# Altium PCB Copy of Final Flashlight PCB.PcbDoc
Units mil, origin at the board's own origin, x right, y up, seen from the top; angles counter-clockwise.
Board outline 1095 x 1220 mil, 2 copper layers (Top Layer, Bottom Layer); 15 components, 12 nets, 42 pads, 4 vias.
Unrouted connection lines stored in the file: 11.
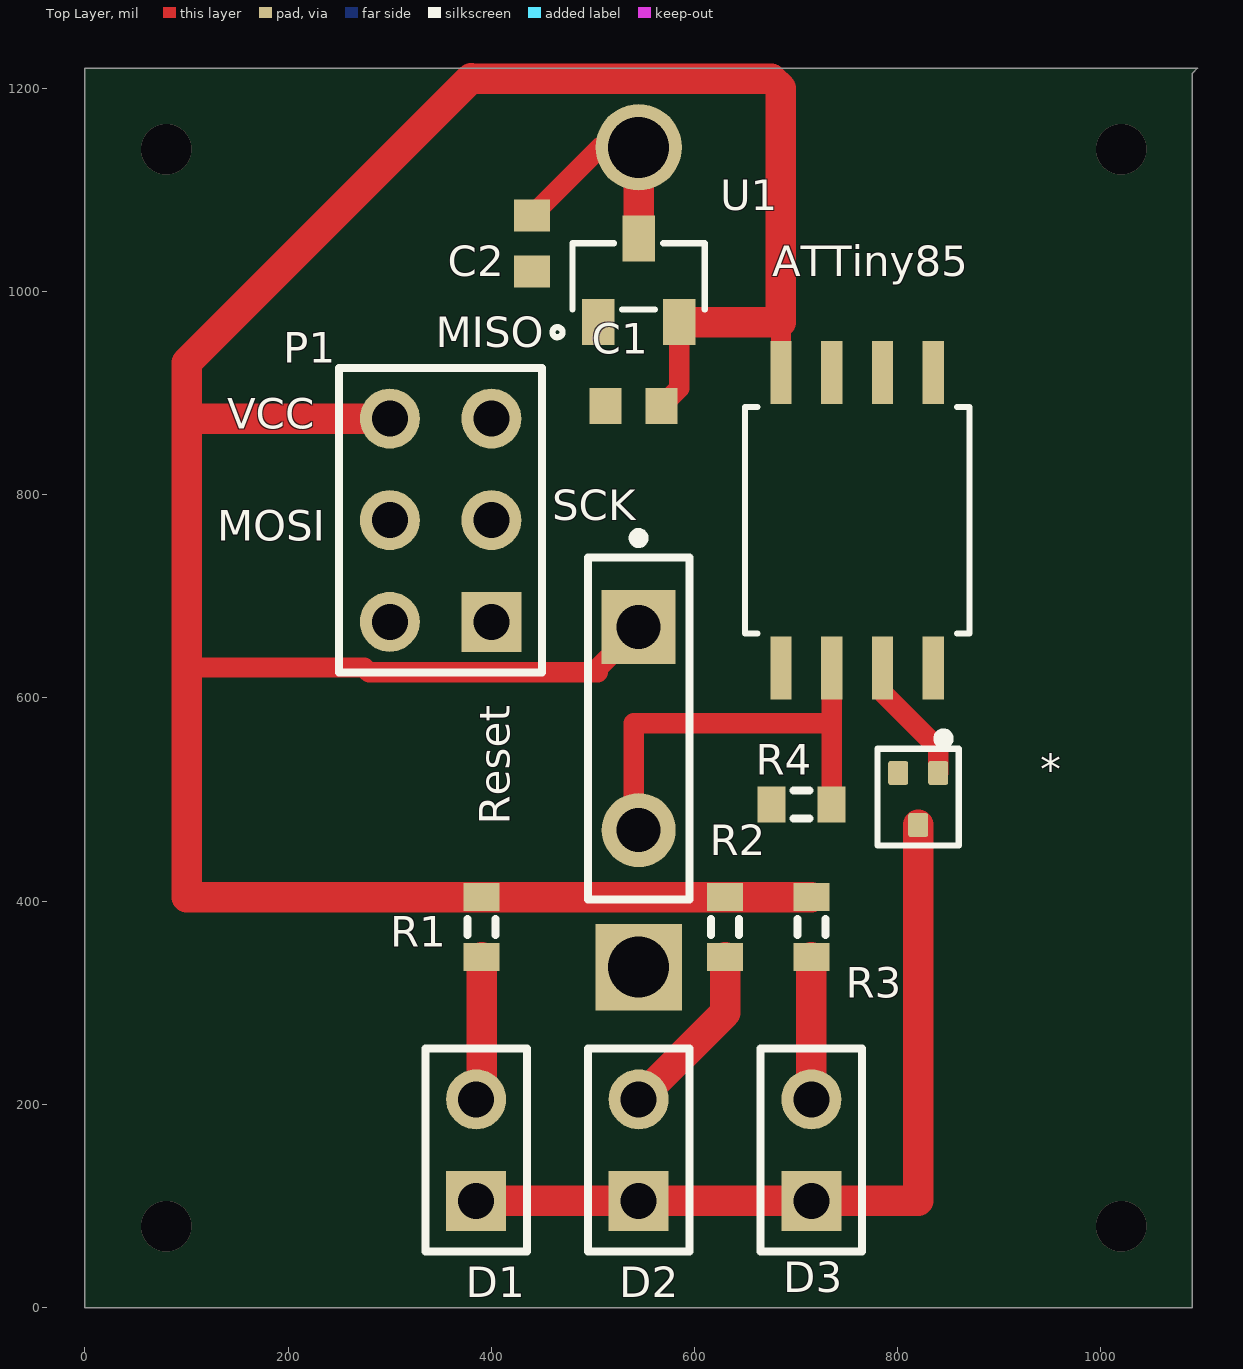
[diagram p0: Top Layer view]
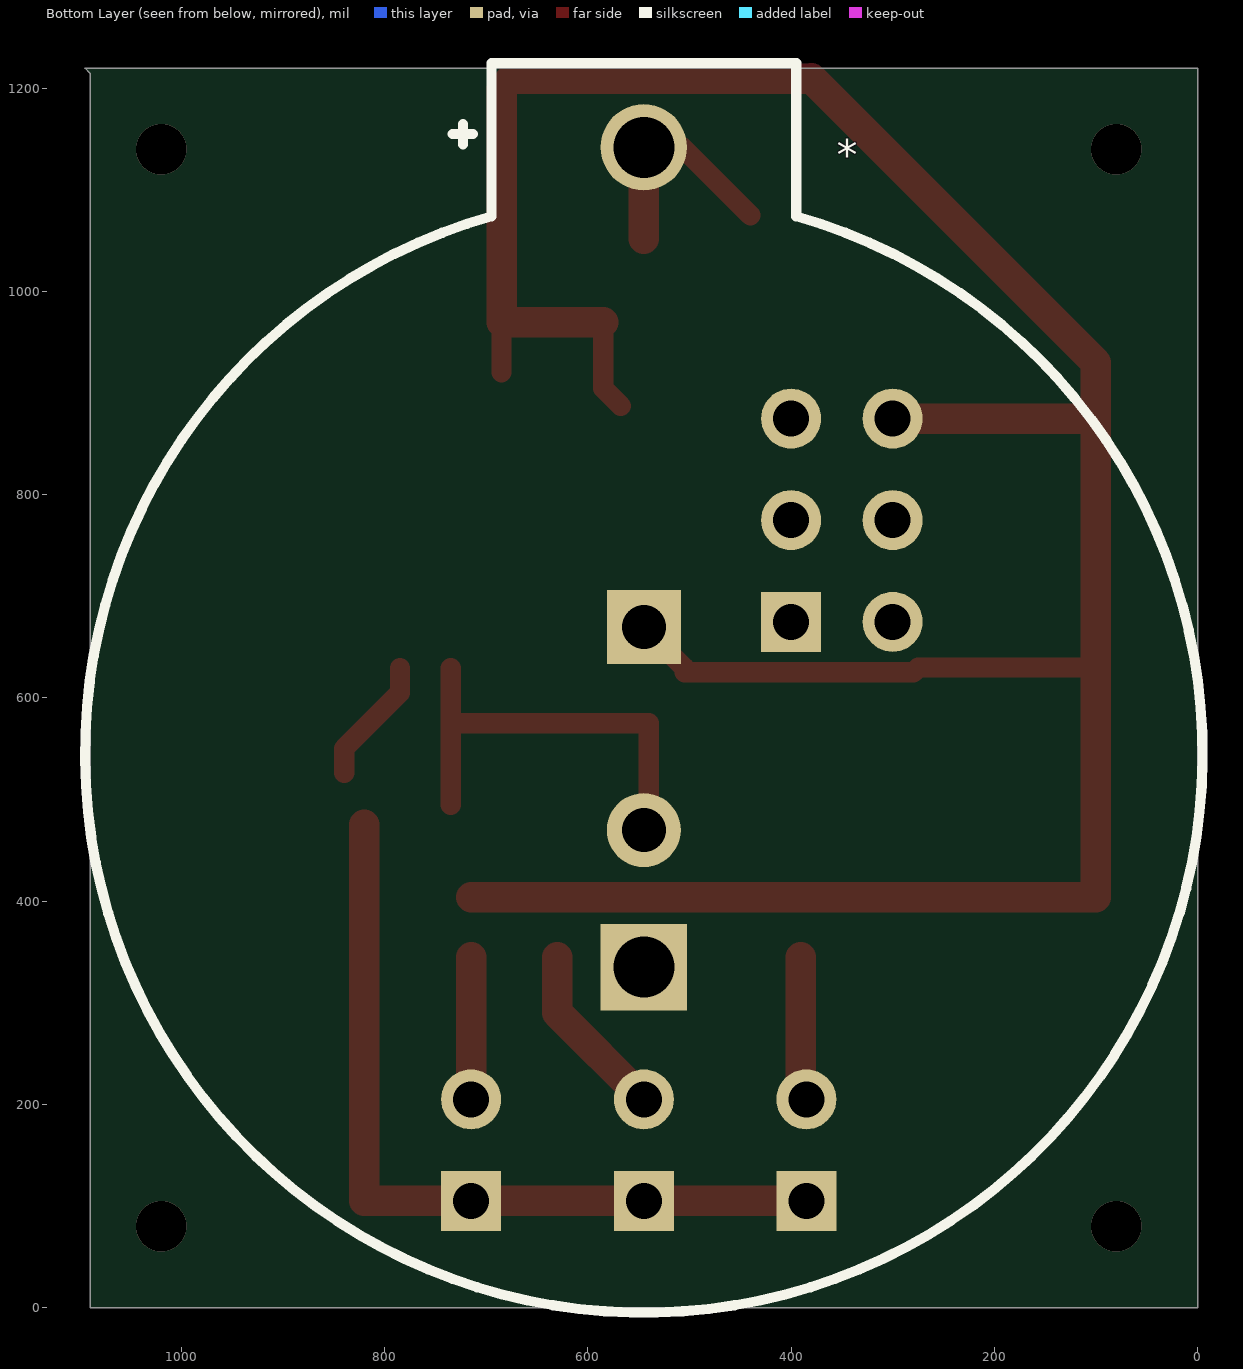
[diagram p1: Bottom Layer view, seen from below]

## Layer stack, top to bottom
Top Solder: solder mask 0.4, Solder Resist, Dk 3.5
Top Layer: signal copper 1.4
Dielectric 1: dielectric 12.6, FR-4, Dk 4.8
Bottom Layer: signal copper 1.4
Bottom Solder: solder mask 0.4, Solder Resist, Dk 3.5

## Board outline
0,0 0,1220 1095,1220 1090,1215 1090,0

## Design rules (kind name [scope] priority, off if disabled: settings)
Clearance [All] p1: gap=10 ignorepadtopadclearanceinfootprint=TRUE except(0: Arc-Hole Track-Hole SMDPad-Hole THPad-Hole Via-Hole Fill-Hole Poly-Hole Region-Hole Text-Hole)
PolygonConnect [All] p1: connectstyle=Direct reliefconductorwidth=10 reliefentries=4 polygonreliefangle="90 Angle" airgapwidth=10
RoutingVias [All] p1: holewidth=28 width=50 viastyle="Through Hole" minholewidth=28 minwidth=50 maxholewidth=28 maxwidth=50
SolderMaskExpansion [All] p1: expansion=4
Width [All] p1: maxlimit=500 minlimit=10 preferedwidth=10 minimp=50.000000 maximp=50.000000 favimp=50.000000
30 further rules are at their usual default settings.

## Classes and differential pairs
component class "181031 Schematic with PCB": * ATTiny85 C1 C2 D1 D2 D3 P1 R1 R2 R3 R4 SCK U1

## Components (designator, comment, footprint, x,y, rotation, side; value= is the part's Value field where it differs from the comment)
* "Keystone 1025" 1025 545,335 r90 bottom
* "N-Channel MOSFET" SOT416 820,475 r90 top
ATTiny85 "ATTiny85" 8S2 760,775 r90 top
C1 "Cap Semi" 1608[0603] 540,887.44 r0 top value=100pF
C2 "Cap Semi" 1608[0603] 440,1047.44 r90 top value=100pF
D1 "LED2" HDR1X2 385,105 r90 top
D2 "LED2" HDR1X2 545,105 r90 top
D3 "LED2" HDR1X2 715,105 r90 top
P1 "Header 3X2A" HDR2X3_CEN 400,675 r90 top
R1 "Res3" J1-0603 390.47,374.53 r90 top value=1K (schematic designator R2)
R2 "Res3" J1-0603 630,374.53 r90 top value=1K (schematic designator R3)
R3 "Res3" J1-0603 715,374.53 r90 top value=1K (schematic designator R4)
R4 "Res3" J1-0603 705.47,495 r0 top value=1K (schematic designator R1)
SCK "SW-PB" SPST-2 545,570 r270 top (schematic designator S1)
U1 "AP2120N-3.3TRG1" SOT-23 545,1015 r0 top value=Value

## Footprints (in the part's own frame and the unit in brackets; to place one, negate y for a bottom-side part, rotate by r counter-clockwise, add the part's x,y. Pads: shape width x height; smd on the part's side, far side on the other; paste and mask are expansions set on the pad)
8S2 [mil]
  rect 62x21 smd paste+0 mask+0: 1(-145.5,75) 2(-145.5,25) 3(-145.5,-25) 4(-145.5,-75) 5(145.5,-75) 6(145.5,-25) 7(145.5,25) 8(145.5,75)
  silkscreen extent -112,-110 112,110, body extent -157,-105 167,106, height 85
1025 [mil] "BATT HOLDER COIN 1/2 CELL PC PIN"
  round 85 hole 60: 1(807,0)
  rect 85x85 hole 60: 2(0,0)
  silkscreen extent -340,-550 890,550, body extent -334,-560 885,547, height 503
1608[0603] [mm] "Chip Capacitor, Body 1.6x0.8mm, IPC High Density"
  rect 0.8x0.9 smd: 1(-0.7,0) 2(0.7,0)
  body extent -0.87,-0.48 0.87,0.48, height 1.3
HDR1X2 [mm] "Connector; Header; 2 Position"
  rect 1.5x1.5 hole 0.9: 1(0,0)
  round 1.5 hole 0.9: 2(2.54,0)
  silkscreen extent -1.27,-1.27 3.81,1.27
HDR2X3_CEN [mm] "Connector; Header; 3x2 Position"
  rect 1.5x1.5 hole 0.9: 1(0,0)
  round 1.5 hole 0.9: 2(2.54,0) 3(5.08,0) 4(0,2.54) 5(2.54,2.54) 6(5.08,2.54)
  silkscreen extent -1.27,-1.27 6.35,3.81
J1-0603 [mm] "Chip Resistor, Body 1.6x0.8mm, IPC High Density"
  rect 0.7x0.9 smd: 1(-0.75,0) 2(0.75,0)
  silkscreen extent -0.2,-0.35 0.2,0.35, body extent -0.85,-0.48 0.85,0.48, height 0.9
SOT416 [mm]
  rrect25% 0.6x0.5 smd: 1(1.3,-0.5) 2(1.3,0.5) 3(0,0)
  silkscreen extent -0.51,-1.02 2.29,1.02
SOT-23 [mil]
  rect 32x45 smd paste+0 mask+0: 1(-40,-45) 2(40,-45) 3(0,37.2)
  silkscreen extent -85,-60 65,33, body extent -58,-62 60,50, height 47
SPST-2 [mm] "Switch; 2 Leads"
  rect 1.85x1.85 hole 1.1: 1(-2.54,0)
  round 1.85 hole 1.1: 2(2.54,0)
  silkscreen extent -4.89,-1.27 4.28,1.27

## Part data
*: "BATT HOLDER COIN 1/2 CELL PC PIN"
ATTiny85: library part ATTiny85_1
C1 C2: "Capacitor (Semiconductor SIM Model)", LatestRevisionDate=29-May-2009, LatestRevisionNote="IPC-7351 Footprint Added.", PackageDescription="Chip Capacitor", PackageReference=C1206, Published=8-Jun-2000, Publisher="Altium Limited"
D1 D2 D3: "Typical RED, GREEN, YELLOW, AMBER GaAs LED", LatestRevisionDate=17-Jul-2002, LatestRevisionNote="Re-released for DXP Platform.", PackageDescription="SM LED; 2 Flat Leads", PackageReference=3.2X1.6X1.1, PackageVersion=Feb-2002, Published=8-Jun-2000, Publisher="Altium Limited"
P1: "Header, 3-Pin, Dual row", LatestRevisionDate=17-Jul-2002, LatestRevisionNote="Re-released for DXP Platform.", Publisher="Altium Limited"
R1 R2 R3 R4: "Resistor", LatestRevisionDate=29-May-2009, LatestRevisionNote="IPC-7351 Footprint Added.", PackageDescription="Chip Resistor", PackageReference=J1-0603, Published=8-Jun-2000, Publisher="Altium Limited"
SCK: "Switch", LatestRevisionDate=17-Jul-2002, LatestRevisionNote="Re-released for DXP Platform.", PackageDescription="Switch; 2 Leads", PackageReference=SPST-2, Published=24-Mar-1999, Publisher="Altium Limited"
U1: "IC REG LINEAR 3.3V 150MA SOT23", Built_By=EMA_UL_Team, Manufacturer_Part_Number=AP2120N-3.3TRG1, RefDes=RefDes, Type=DEV, Vendor="Diodes Inc"

## Via types
v1: diameter 50, hole 50, Top Layer to Bottom Layer, 4 vias

## Nets (pads, with @x,y where several pads share a name; then routed paths per layer and width w, separated by ;. In a path a pad name is that pad's centre, name@x,y a point inside that pad or via, vN(x,y) a via of type N, cw(c..) or ccw(c..) an arc to the next point about the centre after c; other vN are vias at no path point)
GND: *.2 ATTiny85.4 C1.1 C2.1 P1.4 R4.1 U1.1
Net*_1: *.1@839.68,526.18 ATTiny85.3 | length 126
  Top Layer w20: ATTiny85.3 785,605 839.68,550.32 *.1@839.68,526.18
Net*_3: *.3 D1.1 D2.1 D3.1 | length 805
  Top Layer w30: D1.1 D2.1 D3.1 820,105 *.3
NetATTiny85_1: ATTiny85.1 P1.1
NetATTiny85_2: ATTiny85.2 R4.2 SCK.2 | length 411.6
  Top Layer w20: SCK.2@545,495 540,500 540,575 735,575 ; R4.2 735,575 ; ATTiny85.2 735,575
NetATTiny85_5: ATTiny85.5 P1.5
NetATTiny85_6: ATTiny85.6 P1.3
NetATTiny85_7: ATTiny85.7 P1.2 | length 7.1
  Bottom Layer w20: P1.2 P1.2@405,780
NetD1_2: D1.2 R1.1 | length 142.3
  Top Layer w20: D1.2 D1.2@390.47,210.47
  Top Layer w30: D1.2@390.47,210.47 R1.1
NetD2_2: D2.2 R2.1 | length 175.2
  Top Layer w30: D2.2 630,290 R2.1
NetD3_2: D3.2 R3.1 | length 140
  Top Layer w30: D3.2 R3.1
VCC: ATTiny85.8 C1.2 P1.6 R1.2 R2.2 R3.2 SCK.1 U1.2 | length 2983.3
  Top Layer w20: 100,630 274.96,630 279.48,625.47 505,625.47 505,630 SCK.1 ; C1.2 585,904.88 U1.2 ; ATTiny85.8 685,970
  Top Layer w30: P1.6 100,875 ; U1.2 685,970 685,1200 675.5,1209.5 380.5,1209.5 380,1210 100,930 100,875 ; R3.2 R2.2 R1.2 100,404.06 100,630 100,875
pads on no net: *.1@545,1142 C2.2 U1.3
copper on no net: | length 222.5
  Top Layer w20: 440,1075 507,1142 545,1142
  Top Layer w30: 545,1052.2 545,1142
  other v1: 80,80 1020,80 80,1140 1020,1140

## Polygon pours and split planes (outlines as drawn)
no net on Bottom Overlay (solid): 0,1220

## Text inside footprints (layer, text, board x,y; h text height)
ATTiny85: Mechanical 13 "*" at 707.5,671 h50 r90
P1: Top Overlay "VCC" at 140.13,865 h30; Top Overlay "MISO" at 345,945 h30; Top Overlay "Reset" at 418.19,475 h30 r90; Top Overlay "MOSI" at 130,755 h30